# Altium PCB PCB1.PcbDoc
Units mil, origin at the board's own origin, x right, y up, seen from the top; angles counter-clockwise.
Board outline 630 x 330 mil, 2 copper layers (Top Layer, Bottom Layer), stack 62.992 mil thick; 5 components, 5 nets, 18 pads, 4 vias.
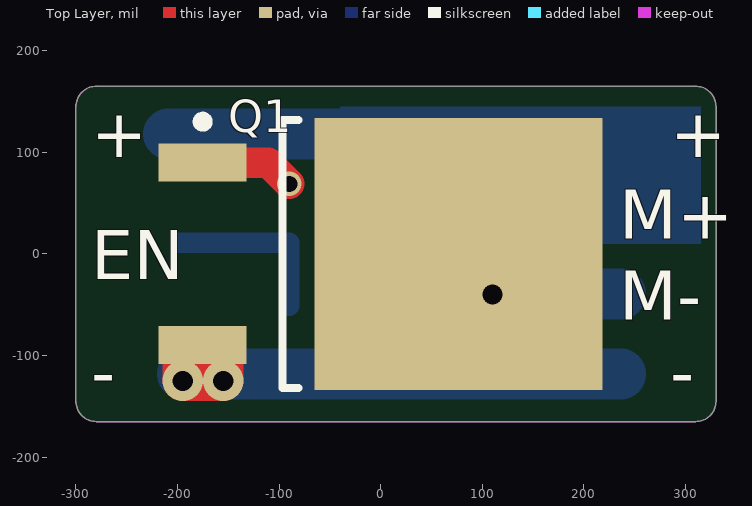
[diagram p0: Top Layer view]
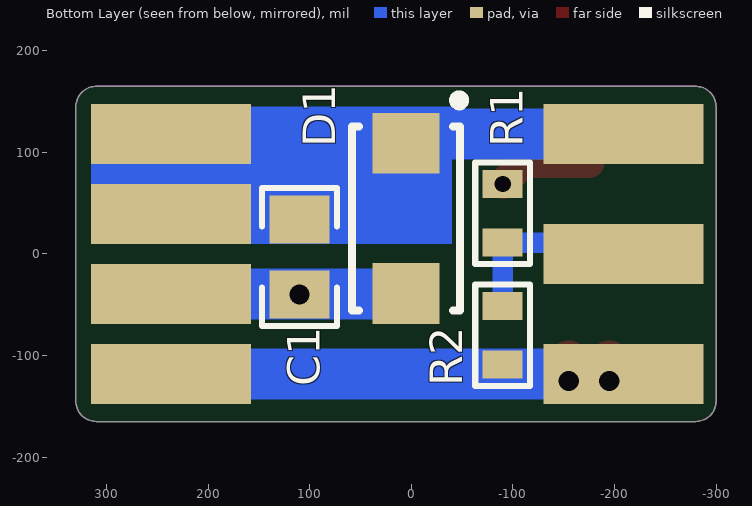
[diagram p1: Bottom Layer view, seen from below]

## Layer stack, top to bottom
Top Layer: signal copper (thickness not stored)
Dielectric 1: dielectric 62.9921, FR-4, Dk 4.8
Bottom Layer: signal copper (thickness not stored)

## Board outline
-300,-145 -300,145 cw(c-280,145) -280,165 310,165 cw(c310,145) 330,145 330,-145 cw(c310,-145) 310,-165 -280,-165 cw(c-280,-145)

## Design rules (kind name [scope] priority, off if disabled: settings)
Clearance [All] p1: gap=10
PolygonConnect [All] p1: connectstyle=Relief reliefconductorwidth=10 reliefentries=4 polygonreliefangle="90 Angle" airgapwidth=10
RoutingVias [All] p1: holewidth=28 width=50 viastyle="Through Hole" minholewidth=28 minwidth=50 maxholewidth=28 maxwidth=50
SolderMaskExpansion [All] p1: expansion=4
Width [All] p1: maxlimit=50 minlimit=10 preferedwidth=10
30 further rules are at their usual default settings.

## Components (designator, comment, footprint, x,y, rotation, side; value= is the part's Value field where it differs from the comment)
C1 "CT41L-0805-2C1-25V-225K" 0805[cap] 110,-3.03 r90 bottom
D1 "S1M-E3/61T" M7 5,35 r270 bottom
Q1 "NMOS-2" DPAK228P991X239-3N 0,0 r0 top
R1 "RMK1608MB102J" 0603[res] -90,40 r90 bottom
R2 "RMK1608MB102J" 0603[res] -90,-80 r90 bottom

## Footprints (in the part's own frame and the unit in brackets; to place one, negate y for a bottom-side part, rotate by r counter-clockwise, add the part's x,y. Pads: shape width x height; smd on the part's side, far side on the other; paste and mask are expansions set on the pad)
0603[res] [mm] "Body 1.6x0.8mm"
  rect 0.7x1 smd: 1(-0.735,0) 2(0.735,0)
  silkscreen extent -1.27,-0.69 1.27,0.69, body extent -0.76,-0.38 0.76,0.38, height 0.75
0805[cap] [mm] "2.0 x 1.3 mm"
  rect 1.2x1.5 smd: 1(-0.939,0) 2(0.939,0)
  silkscreen extent -1.73,-0.94 1.73,0.94, body extent -1.02,-0.64 1.02,0.64, height 0.89
DPAK228P991X239-3N [mm] "D-PAK, 3-Pads, Body 6.21x6.73mm (max), IPC Medium Density"
  rect 2.2x0.95 smd: 1(-4.45,2.28) 3(-4.45,-2.28)
  rect 7.2x6.8 smd: 2(1.95,0)
  silkscreen extent -4.57,-3.35 -2.05,3.43, body extent -2.45,-3.37 3.77,3.37, height 2.39
M7 [mm] "Molded Diode, 2-Leads, Body 4.3x2.5mm, IPC Medium Density"
  rect 1.52x1.68 smd: 1(1.88,0) 2(-1.88,0)
  silkscreen extent -3.07,-1.35 2.3,1.45, body extent -2.3,-1.33 2.3,1.32, height 2.45

## Part data
C1: library part Capacitor, "Chip Capacitor"
D1: library part "Diode 1N4007", "1 Amp General Purpose Rectifier"
Q1: "N-Channel Power MOSFET"
R1 R2: library part Resistor, "Resistor"

## Free pads (board coordinates)
  rect 157.48x59.06 smd far side: 5(-208.78,-118.11) 5(-208.78,0) 5(-208.78,118.11) 5(236.22,-118.11) 5(236.22,-39.37) 5(236.22,39.37) 5(236.22,118.11)

## Via types
v1: diameter 40, hole 20, Top Layer to Bottom Layer, tented both sides, 3 vias
v2: diameter 24, hole 16, Top Layer to Bottom Layer, tented both sides, 1 vias

## Nets (pads, with @x,y where several pads share a name; then routed paths per layer and width w, separated by ;. In a path a pad name is that pad's centre, name@x,y a point inside that pad or via, vN(x,y) a via of type N, cw(c..) or ccw(c..) an arc to the next point about the centre after c; other vN are vias at no path point)
MOTOR-: C1.1 D1.1 pad.5@236.22,-39.37 Q1.2 | length 230.9
  Bottom Layer w50: D1.1@5.35,-39.37 pad.5@236.22,-39.37
  other v1: 110,-40
MOTOR_EN: pad.5@-208.78,0 R1.1 R2.2 | length 169.8
  Bottom Layer w20: pad.5@-197.72,11.06 R1.1 R2.2
NetQ1_1: Q1.1 R1.2 | length 93.8
  Top Layer w30: Q1.1 -110.83,89.76 v2(-90,68.94)
PGND: pad.5@236.22,-118.11 pad.5@-208.78,-118.11 Q1.3 R2.1 | length 511.2
  Top Layer w40: Q1.3@-195,-105 v1(-195,-125) v1(-155,-125) Q1.3@-155,-105
  Bottom Layer w50: pad.5@-195,-118.11 pad.5@236.22,-118.11
VCC: C1.2 D1.2 pad.5@236.22,39.37 pad.5@236.22,118.11 pad.5@-208.78,118.11 | length 204.7
  Bottom Layer w50: pad.5@-208.78,118.11 D1.2@-4.09,118.11

## Keep-outs
Keep-Out Layer:
  the board outline again, w1

## Other copper
Bottom Layer:
  rectangle net VCC: -40,10 315,145

## Silkscreen, mask and mechanical layers (free items; w line width, h text height)
Top Overlay:
  text "+" at -285,95 h48
  text "+" at 285,95 h48
  text "M+" at 235,15 h48
  text "EN" at -285,-25 h48
  text "M-" at 235,-65 h48
  text "-" at -285,-140 h48
  text "-" at 285,-140 h48